# EAGLE board mainboard-gsm (EAGLE 6.2), part 1 of 2
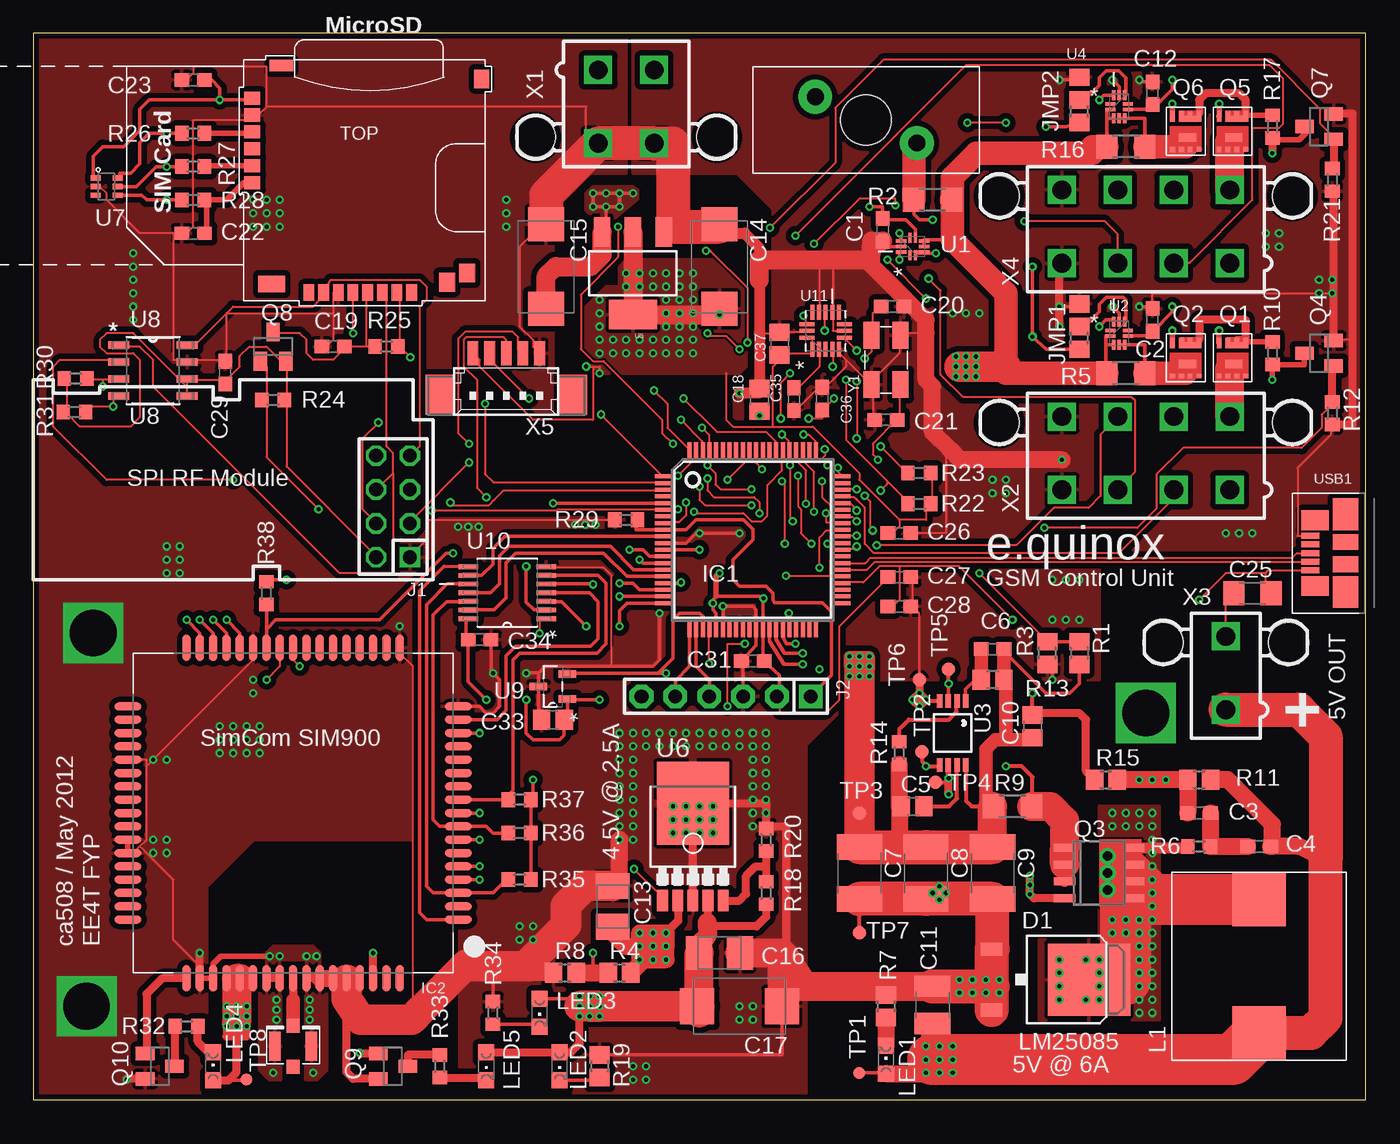
[diagram p0: board, top side]
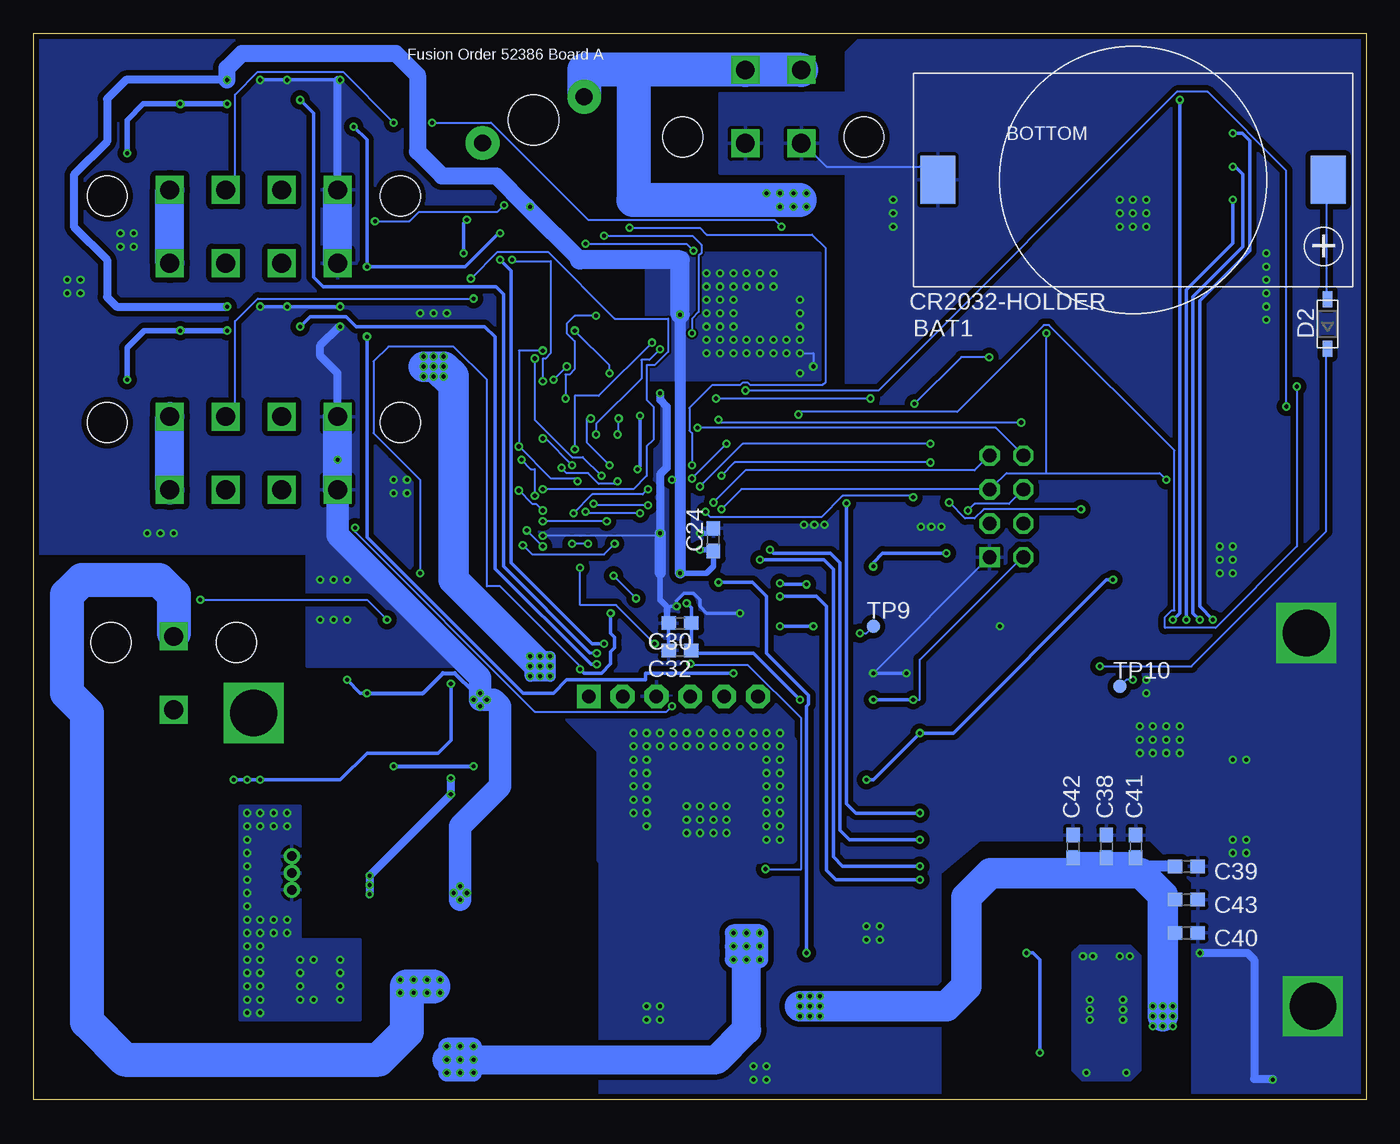
[diagram p1: board, bottom side, seen from below]

Size 100 x 80 mm. Coordinates in mm from the lower left corner, seen from the top.
Outline: 0,0 100,0 100,80 0,80 0,0
Copper layers (1*16): Top 0.035mm / dielectric 1.5mm / Bottom 0.035mm
Design rules: minimum track width 6mil, minimum drill 12mil, track to track 6mil, track to pad 6mil, pad to pad 6mil, via to via 6mil, smd to smd 0mil, copper to edge 10mil, drill to drill 10mil, minimum pad ring 10mil, minimum via ring 6mil, stop-mask expansion 2mil, vias tented up to drill 100mil, thermal gap 10mil
tRestrict: area 18.7,2 to 19,8; area 20,2 to 20.3,8

## Footprints (pad centres in the part's own frame; a part is rotated, then mirrored left to right if it is on the bottom)
U.FL = smd 2.2 x 0.85: P$1 0,1.375; P$2 0,-1.375 | smd 1.05 x 1: P$3 1.525,0; P$4 -1.525,0
CH28-2032L = smd 3.6 x 2.6: N 0,14.65; P 0,-14.65
C0603 = smd 1.1 x 1: 1 -0.85,0; 2 0.85,0
C0805 = smd 1.3 x 1.5: 1 -0.85,0; 2 0.85,0
C1812 = smd 1.9 x 3.4: 1 -1.95,0; 2 1.95,0
C1210 = smd 1.6 x 2.7: 1 -1.4,0; 2 1.4,0
B/3528-21R = smd 1.95 x 2.5: + 1.525,0; - -1.525,0
D/7343-31R = smd 2.55 x 2.7: + 3.175,0; - -3.175,0
C1206 = smd 1.6 x 1.8: 1 -1.4,0; 2 1.4,0
LTF153008 = drill 1.27 pad 2.54: 1 1.73,3.81; 2 -1.73,-3.81 | hole 3.78: 0,0
TO252-AA = smd 1 x 1.6: 1 -2.28,-6.07; 3 2.28,-6.07 | smd 5.4 x 6.2: 4 0,1.23
SOD-123 = smd 1.2 x 0.7: A 1.85,0; C -1.85,0
TQFP80-12X12 = smd 1.2 x 0.3: 1 -6.725,4.75; 2 -6.725,4.25; 3 -6.725,3.75; 4 -6.725,3.25; 5 -6.725,2.75; 6 -6.725,2.25; 7 -6.725,1.75; 8 -6.725,1.25; 9 -6.725,0.75; 10 -6.725,0.25; 11 -6.725,-0.25; 12 -6.725,-0.75; 13 -6.725,-1.25; 14 -6.725,-1.75; 15 -6.725,-2.25; 16 -6.725,-2.75; 17 -6.725,-3.25; 18 -6.725,-3.75; 19 -6.725,-4.25; 20 -6.725,-4.75; 41 6.725,-4.75; 42 6.725,-4.25; 43 6.725,-3.75; 44 6.725,-3.25; 45 6.725,-2.75; 46 6.725,-2.25; 47 6.725,-1.75; 48 6.725,-1.25; 49 6.725,-0.75; 50 6.725,-0.25; 51 6.725,0.25; 52 6.725,0.75; 53 6.725,1.25; 54 6.725,1.75; 55 6.725,2.25; 56 6.725,2.75; 57 6.725,3.25; 58 6.725,3.75; 59 6.725,4.25; 60 6.725,4.75 | smd 0.3 x 1.2: 21 -4.75,-6.725; 22 -4.25,-6.725; 23 -3.75,-6.725; 24 -3.25,-6.725; 25 -2.75,-6.725; 26 -2.25,-6.725; 27 -1.75,-6.725; 28 -1.25,-6.725; 29 -0.75,-6.725; 30 -0.25,-6.725; 31 0.25,-6.725; 32 0.75,-6.725; 33 1.25,-6.725; 34 1.75,-6.725; 35 2.25,-6.725; 36 2.75,-6.725; 37 3.25,-6.725; 38 3.75,-6.725; 39 4.25,-6.725; 40 4.75,-6.725; 61 4.75,6.725; 62 4.25,6.725; 63 3.75,6.725; 64 3.25,6.725; 65 2.75,6.725; 66 2.25,6.725; 67 1.75,6.725; 68 1.25,6.725; 69 0.75,6.725; 70 0.25,6.725; 71 -0.25,6.725; 72 -0.75,6.725; 73 -1.25,6.725; 74 -1.75,6.725; 75 -2.25,6.725; 76 -2.75,6.725; 77 -3.25,6.725; 78 -3.75,6.725; 79 -4.25,6.725; 80 -4.75,6.725
SIM900_SMT = smd 2 x 0.6: P$1 -12.4,8; P$2 -12.4,7; P$3 -12.4,6; P$4 -12.4,5; P$5 -12.4,4; P$6 -12.4,3; P$7 -12.4,2; P$8 -12.4,1; P$9 -12.4,0; P$10 -12.4,-1; P$11 -12.4,-2; P$12 -12.4,-3; P$13 -12.4,-4; P$14 -12.4,-5; P$15 -12.4,-6; P$16 -12.4,-7; P$17 -12.4,-8; P$35 12.4,-8; P$36 12.4,-7; P$37 12.4,-6; P$38 12.4,-5; P$39 12.4,-4; P$40 12.4,-3; P$41 12.4,-2; P$42 12.4,-1; P$43 12.4,0; P$44 12.4,1; P$45 12.4,2; P$46 12.4,3; P$47 12.4,4; P$48 12.4,5; P$49 12.4,6; P$50 12.4,7; P$51 12.4,8 | smd 0.6 x 2: P$18 -8,-12.4; P$19 -7,-12.4; P$20 -6,-12.4; P$21 -5,-12.4; P$22 -4,-12.4; P$23 -3,-12.4; P$24 -2,-12.4; P$25 -1,-12.4; P$26 0,-12.4; P$27 1,-12.4; P$28 2,-12.4; P$29 3,-12.4; P$30 4,-12.4; P$31 5,-12.4; P$32 6,-12.4; P$33 7,-12.4; P$34 8,-12.4; P$52 8,12.4; P$53 7,12.4; P$54 6,12.4; P$55 5,12.4; P$56 4,12.4; P$57 3,12.4; P$58 2,12.4; P$59 1,12.4; P$60 0,12.4; P$61 -1,12.4; P$62 -2,12.4; P$63 -3,12.4; P$64 -4,12.4; P$65 -5,12.4; P$66 -6,12.4; P$67 -7,12.4; P$68 -8,12.4
DIL-100-2X04 = drill 1.016 square: 1 -3.81,-1.27 | drill 1.016 octagon: 2 -3.81,1.27; 3 -1.27,-1.27; 4 -1.27,1.27; 5 1.27,-1.27; 6 1.27,1.27; 7 3.81,-1.27; 8 3.81,1.27
SIP-100-06-40 = drill 1.016 pad 1.778 square: 1 -6.35,0 | drill 1.016 pad 1.778 octagon: 2 -3.81,0; 3 -1.27,0; 4 1.27,0; 5 3.81,0; 6 6.35,0
A0R-JMP = smd 1.5 x 1.3: 1 0,1.7; 2 0,0; 3 0,-1.7
HC9-XXX-R = smd 4 x 4: 1 0,5; 2 0,-5
CHIPLED_0805 = smd 1.2 x 1.2: A 0,-1.05; C 0,1.05
IR_PQFN_FET = smd 0.35 x 0.35: 1 0,0; 2 0,-0.67; 3 0,-1.34; 5 2.7,-2.01; 6 2.7,-1.34; 7 2.7,-0.67; 8 2.7,0 | smd 0.45 x 1.69: 3B 0.4,-0.67 | smd 0.8 x 0.35: 4 0.225,-2.01 | smd 0.635 x 1.27: 9 1.8,-0.9
SO8-FET = smd 0.6 x 1.6: 1 -1.905,-2.6; 2 -0.635,-2.6; 3 0.635,-2.6; 4 1.905,-2.6; 5 1.905,2.6; 6 0.635,2.6; 7 -0.635,2.6; 8 -1.905,2.6 | drill 0.7: D1 -1.27,0.635; D2 0,0.635; D3 1.27,0.635
SOT23 = smd 1 x 1.4: 1 -0.95,-1.1; 2 0.95,-1.1; 3 0,1.1
R0805 = smd 1.3 x 1.5: 1 -0.85,0; 2 0.85,0
R1206 = smd 1.6 x 1.803: 1 -1.422,0; 2 1.422,0
R0603 = smd 1 x 1.1: 1 -0.85,0; 2 0.85,0
MOLEX_SDSIM_COMBO = smd 1.1 x 1.4: G1 0.25,1.435 | smd 1.75 x 0.85: G2 15.275,0.425 | smd 2 x 1.25: G3 16,16.825 | smd 1.2 x 0.98: S1 17.45,2.88; S2 17.45,5.42; S3 17.45,7.96; S4 17.45,4.15; S5 17.45,6.69; S6 17.45,9.23 | smd 1.2 x 1.4: ST1 2.84,16.7; ST2 1.34,16 | smd 0.8 x 1.25: T1 5.5,17.475; T2 6.6,17.475; T3 7.7,17.475; T4 8.8,17.475; T5 9.9,17.475; T6 11,17.475; T7 12.1,17.475; T8 13.2,17.475
TP09R = smd 0.9 x 0.9: TP 0,0
TP10R = smd 1 x 1: TP 0,0
QFN40P140X180X55-10N = smd 0.762 x 0.254: 1 -0.66,0.203; 2 -0.66,-0.203; 6 0.66,-0.203; 7 0.66,0.203 | smd 0.254 x 0.762: 3 -0.406,-0.864; 4 0,-0.864; 5 0.406,-0.864; 8 0.406,0.864; 9 0,0.864; 10 -0.406,0.864
MINI-SO8 = smd 0.41 x 1.02: 1 -0.975,-2.4; 2 -0.325,-2.4; 3 0.325,-2.4; 4 0.975,-2.4; 5 0.975,2.4; 6 0.325,2.4; 7 -0.325,2.4; 8 -0.975,2.4
SOT223 = smd 1.219 x 2.235: 1 -2.311,-3.099; 2 0,-3.099; 3 2.311,-3.099 | smd 3.6 x 2.2: 4 0,3.099
TO252-5 = smd 0.8 x 1.6: 1 -2.28,-6.07; 2 -1.14,-6.07; 3 0,-6.07; 4 1.14,-6.07; 5 2.28,-6.07 | smd 5.4 x 6.2: TAB 0,1.23
SC70-6L = smd 0.4 x 0.75: 1 -0.65,-0.825; 2 0,-0.825; 3 0.65,-0.825; 4 0.65,0.825; 5 -0.015,0.825; 6 -0.65,0.825
SOIC127P600X175-8N = smd 1.6 x 0.559: 1 -2.565,1.905; 2 -2.565,0.635; 3 -2.565,-0.635; 4 -2.565,-1.905; 5 2.565,-1.905; 6 2.565,-0.635; 7 2.565,0.635; 8 2.565,1.905
SOT95P237X112-3N = smd 1.321 x 0.559: 1 -1.092,0.94; 2 -1.092,-0.94; 3 1.092,0
SOP65P640X120-14N = smd 1.473 x 0.356: 1 -2.921,1.956; 2 -2.921,1.295; 3 -2.921,0.66; 4 -2.921,0; 5 -2.921,-0.66; 6 -2.921,-1.295; 7 -2.921,-1.956; 8 2.921,-1.956; 9 2.921,-1.295; 10 2.921,-0.66; 11 2.921,0; 12 2.921,0.66; 13 2.921,1.295; 14 2.921,1.956
QFN50P300X300X100-16N = smd 1.118 x 0.305: 1 -1.397,0.991; 2 -1.397,0.508; 3 -1.397,0; 4 -1.397,-0.508; 5 -1.397,-0.991; 9 1.397,-0.991; 10 1.397,-0.508; 11 1.397,0; 12 1.397,0.508; 13 1.397,0.991 | smd 0.305 x 1.118: 6 -0.508,-1.397; 7 0,-1.397; 8 0.508,-1.397; 14 0.508,1.397; 15 0,1.397; 16 -0.508,1.397
47346-0001 = smd 1.38 x 0.45: 1 2.66,1.3; 2 2.66,0.65; 3 2.66,0; 4 2.66,-0.65; 5 2.66,-1.3 | smd 1.9 x 2.375: SHIELD-1 0,2.913; SHIELD-4 0,-2.913 | smd 1.9 x 1.175: SHIELD-2 0,0.838; SHIELD-3 0,-0.838 | smd 2.1 x 1.475: SHIELD-6 2.3,2.462; SHIELD-7 2.3,-2.462
5566-4 = drill 1.4 square: 1 2.1,-2.75; 2 -2.1,-2.75; 3 2.1,2.75; 4 -2.1,2.75 | hole 3: 6.8,2.29; -6.8,2.29
5566-8 = drill 1.4 square: 1 6.3,-2.75; 2 2.1,-2.75; 3 -2.1,-2.75; 4 -6.3,-2.75; 5 6.3,2.75; 6 2.1,2.75; 7 -2.1,2.75; 8 -6.3,2.75 | hole 3: 11,2.29; -11,2.29
5566-2 = drill 1.4 square: 1 0,-2.75; 2 0,2.75 | hole 3: 4.7,2.29; -4.7,2.29
53398-05 = smd 0.8 x 1.8: 1 2.5,-2.5; 2 1.25,-2.5; 3 0,-2.5; 4 -1.25,-2.5; 5 -2.5,-2.5 | smd 2.1 x 3: S1 5,0.625; S2 -5,0.625
TXC-7B = smd 2 x 1.2: 1 -1.85,-1.1; 2 1.85,-1.1; 3 1.85,1.1; 4 -1.85,1.1

## Placement (x,y rotation side)
ANT1  U.FL  [U.FL]  19.5,4 90 top
BAT1  CR2032-HOLDER  [CH28-2032L]  17.5,69 90 bottom
C1  0.1u  [C0603]  63.75,65.25 270 top
C2  0.1u  [C0603]  84,58.5 90 top
C3  0.1u  [C0603]  87.5,21.5 180 top
C4  3300pF  [C0603]  92,19 180 top
C5  0.47uF  [C0805]  66,22 0 top
C6  1000pF  [C0603]  72,33.8 180 top
C7  22u  [C1812]  62,17 270 top
C8  22u  [C1812]  67,17 270 top
C9  22u  [C1812]  72,17 270 top
C10  1u  [C0805]  75,28 90 top
C11  100u  [C1210]  67.5,7.1 90 top
C12  0.1u  [C0603]  84,75.5 90 top
C13  100u  [B/3528-21R]  43.5,14.5 270 top
C14  10u  [D/7343-31R]  51.5,62.5 270 top
C15  10u  [D/7343-31R]  38.5,62.5 270 top
C16  100u  [B/3528-21R]  51.5,11 180 top
C17  10u  [D/7343-31R]  53,7 180 top
C18  10uF  [C0805]  54.5,52.5 270 top
C19  100nF  [C0603]  22.5,56.5 180 top
C20  100nF  [C0603]  64.5,59.5 180 top
C21  100nF  [C0603]  64,51 0 top
C22  22pF  [C0603]  12,65 180 top
C23  22pF  [C0603]  12,76.5 180 top
C24  100nF  [C0603]  49,42 90 bottom
C25  0.47uF  [C1206]  91.5,38 0 top
C26  100nF  [C0603]  65,42.5 180 top
C27  100nF  [C0603]  65,39.2 180 top
C28  100nF  [C0603]  65,37 180 top
C29  100nF  [C0603]  14.41,54.54 90 top
C30  100nF  [C0603]  51.5,35.75 180 bottom
C31  100nF  [C0603]  54,32.9 180 top
C32  100nF  [C0603]  51.5,33.7 180 bottom
C33  0.47u  [C0805]  39,28.5 180 top
C34  100nF  [C0603]  33.5,34.5 0 top
C35  100nF  [C0603]  57.09,52.56 270 top
C36  100nF  [C0603]  59.21,52.59 90 top
C37  4.7uF  [C0805]  56.01,56.72 90 top
C38  10nF  [C0603]  19.5,19 270 bottom
C39  10pF  [C0603]  13.5,17.5 180 bottom
C40  8.2pF  [C0603]  13.5,12.5 180 bottom
C41  39pF  [C0603]  17.3,19 270 bottom
C42  33pF  [C0603]  22,19 270 bottom
C43  100nF  [C0603]  13.5,15 180 bottom
CONN1  MINIBLADE_SOCKET  [LTF153008]  62.5,73.5 90 top
D1  6CWQ04FNPBF  [TO252-AA]  78,9 270 top
D2  [SOD-123]  2.9,58.2 90 bottom
IC1  PIC24FJ256GB108  [TQFP80-12X12]  54,42 0 top
IC2  [SIM900_SMT]  19.5,21.5 180 top
J1  F-2X04-DIL-100  [DIL-100-2X04]  27,44.5 90 top
J2  M-1X06-SIP-100-40  [SIP-100-06-40]  52,30.25 180 top
JMP1  0R-JUMPA  [A0R-JMP]  78.5,58 180 top
JMP2  0R-JUMPA  [A0R-JMP]  78.5,75 180 top
L1  22uH  [HC9-XXX-R]  92,10 0 top
LED1  [CHIPLED_0805]  64,3 0 top
LED2  [CHIPLED_0805]  39.5,2.5 180 top
LED3  [CHIPLED_0805]  38,6.5 180 top
LED4  [CHIPLED_0805]  13.5,2.5 0 top
LED5  [CHIPLED_0805]  34,2.5 180 top
Q1  IRFHM9331PBF  [IR_PQFN_FET]  91,57 270 top
Q2  IRFHM9331PBF  [IR_PQFN_FET]  87.5,57 270 top
Q3  SI4401BDY  [SO8-FET]  80,17 270 top
Q4  [SOT23]  96.5,56 90 top
Q5  IRFHM9331PBF  [IR_PQFN_FET]  91,74 270 top
Q6  IRFHM9331PBF  [IR_PQFN_FET]  87.5,74 270 top
Q7  [SOT23]  96.5,73 90 top
Q8  BSS84  [SOT23]  18,56.5 0 top
Q9  2N2007  [SOT23]  27,2.5 270 top
Q10  [SOT23]  9.5,2.5 270 top
R1  30k  [R0805]  78.5,33.5 270 top
R2  0.002  [R1206]  67.5,67.5 0 top
R3  10k  [R0805]  76.1,33.5 90 top
R4  2k  [R0805]  44,9.5 0 top
R5  0.002  [R1206]  82,54.5 0 top
R6  68k  [R0603]  87.5,19 0 top
R7  2.7k  [R0805]  64,7 270 top
R8  3k  [R0805]  39.9,9.5 0 top
R9  10m  [R1206]  73.5,22 0 top
R10  100k  [R0603]  93,56 90 top
R11  10k  [R0805]  87.5,24 0 top
R12  10k  [R0603]  97.5,51.5 90 top
R13  2.37k  [R0805]  72,31.5 180 top
R14  88.7k  [R0603]  65,26 90 top
R15  3.4k  [R0805]  80.5,24 0 top
R16  0.002  [R1206]  82,71.5 0 top
R17  100k  [R0603]  93,73 90 top
R18  57k  [R0603]  55,15.5 270 top
R19  2.7k  [R0805]  42.5,2.5 270 top
R20  22k  [R0603]  55,19.5 270 top
R21  10k  [R0603]  97.5,69 90 top
R22  2.7k  [R0603]  66.5,44.7 0 top
R23  2.7k  [R0603]  66.5,47 0 top
R24  10k  [R0603]  18,52.5 0 top
R25  10k  [R0603]  26.5,56.5 180 top
R26  22  [R0603]  12,72.5 180 top
R27  22  [R0603]  12,70 180 top
R28  22  [R0603]  12,67.5 180 top
R29  10k  [R0603]  44.5,43.5 0 top
R30  100k  [R0603]  3.17,54.09 0 top
R31  100k  [R0603]  3.09,51.59 0 top
R32  300  [R0603]  11.5,5.5 0 top
R33  300  [R0603]  30.5,2.5 270 top
R34  300  [R0603]  34.5,6.5 270 top
R35  2K7  [R0603]  36.5,16.5 0 top
R36  2K7  [R0603]  36.5,20 0 top
R37  2K7  [R0603]  36.5,22.5 0 top
R38  2K7  [R0603]  17.5,38 90 top
SLOT1  MOLEX_SD_SIM_CONN  [MOLEX_SDSIM_COMBO]  33.89,78.02 180 top
TP1  TPTP09R  [TP09R]  62,2 0 top
TP2  TPTP10R  [TP10R]  66.7,26.1 0 top
TP3  TPTP10R  [TP10R]  62,21.5 0 top
TP4  TPTP10R  [TP10R]  67.7,23.8 0 top
TP5  TPTP10R  [TP10R]  68.7,32.3 0 top
TP6  TPTP10R  [TP10R]  66.5,31.5 0 top
TP7  TPTP10R  [TP10R]  62,12.5 0 top
TP8  TPTP09R  [TP09R]  16,1.5 0 top
TP9  TPTP10R  [TP10R]  37,35.5 0 bottom
TP10  TPTP10R  [TP10R]  18.5,31 0 bottom
U1  INA199A2RSWT  [QFN40P140X180X55-10N]  66,64 90 top
U2  INA199A2RSWT  [QFN40P140X180X55-10N]  81.5,57.5 0 top
U3  LM25085MME  [MINI-SO8]  69,27.5 180 top
U4  INA199A2RSWT  [QFN40P140X180X55-10N]  81.5,74.5 0 top
U5  [SOT223]  45,62 180 top
U6  MIC35302  [TO252-5]  49.5,21 0 top
U7  [SC70-6L]  5.5,68.5 270 top
U8  AT45DB081D-SSU  [SOIC127P600X175-8N]  8.98,54.7 0 top
U9  REF3012AIDBZT  [SOT95P237X112-3N]  39,31 180 top
U10  SN74LVC07APW  [SOP65P640X120-14N]  35.57,38.03 180 top
U11  MMA8453Q  [QFN50P300X300X100-16N]  59.47,57.68 90 top
USB1  MOLEX47346-0001  [47346-0001]  98.5,41 180 top
X1  5566-4  [5566-4]  44.5,74.5 180 top
X2  5566-8  [5566-8]  83.5,48.5 0 top
X3  5566-2  [5566-2]  89.5,32 0 top
X4  5566-8  [5566-8]  83.5,65.5 0 top
X5  53398-05  [53398-05]  35.5,53.5 180 top
Y1  TXC-7B  [TXC-7B]  64,55.5 90 top

## Library data of the parts
ANT1 = SparkFun-Connectors
BAT1 Q1 Q2 Q5 Q6 = probox-parts
C1-C3 C6 C8-C10 C12 C18-C43 R1 R3 R4 R7 R8 R10 R12 R17-R38 = resistor
C4 = resistor; FARNELL: 1658867
C5 = resistor; FARNELL: 1907325
C7 = resistor; FARNELL: 1843167
C11 = resistor; FARNELL: 1907361
C13 C16 = resistor; FARNELL: 1658149
C14 C15 C17 = resistor; FARNELL: CA06884
CONN1 = eko-parts
D1 = probox-parts; FARNELL: 9101055
D2 Q4 Q7 Q9 Q10 = adafruit
IC1 = microchip; MPN: PIC24FJ256GB108-I/PT; OC_FARNELL: 1576869; OC_NEWARK: 54M5131
IC2 = microbuilder
J1 J2 = con-headers-jp
JMP1 JMP2 = jump-0r-smd
L1 = probox-parts; FARNELL: 2075650
LED1-LED5 = led
Q3 = probox-parts; FARNELL: 2101443
Q8 = transistor-small-signal; FARNELL: 1972673
R2 R5 R16 = resistor; FARNELL: 1621962
R6 = resistor; FARNELL: 1399961
R9 = resistor; FARNELL: 1099907
R11 = resistor; FARNELL: 1653284
R13 = resistor; FARNELL: 1652973
R14 = resistor; FARNELL: 1170981
R15 = resistor; FARNELL: 1160169
SLOT1 = farnellparts; FARNELL: 2064064; MOLEX: 49448-1411
TP1-TP10 = testpad
U1 U2 U4 = probox-parts; MPN: INA199A2RSWT; OC_FARNELL: 1815789; OC_NEWARK: 74R0562; PACKAGE: UQFN-10; SUPPLIER: Texas Instrument
U3 = probox-parts; FARNELL: 1689554
U5 = SparkFun-PowerIC; FARNELL: 2057285
U6 = probox-parts; FARNELL: 1822373
U7 = IC
U8 = farnellparts; DESCRIPTION: Data Flash; MPN: AT45DB081D-SSU; OC_FARNELL: 1455038; OC_NEWARK: 58M3836; PACKAGE: SOIC-8; SUPPLIER: Atmel
U9 = probox-parts; MPN: REF3120AIDBZT; OC_FARNELL: 1470321; OC_NEWARK: 90H3371; PACKAGE: SOT-23-3; SUPPLIER: Texas Instruments
U10 = farnellparts; DESCRIPTION: QUADRUPLE FET BUS SWITCH 2.5-V/3.3-V LOW-VOLTAGE BUS SWITCH WITH 5-V-TOLERANT LEVEL SHIFTER; MPN: SN74LVC07APW; OC_FARNELL: 1236302; OC_NEWARK: 13M5252; PACKAGE: TSSOP-14; SUPPLIER: Texas Instruments
U11 = farnellparts
USB1 = connectors-bbng
X1 X2 X4 = con-molex; OC_FARNELL: unknown; OC_NEWARK: unknown
X3 = con-molex; OC_FARNELL: 1822072; OC_NEWARK: unknown
X5 = con-molex; OC_FARNELL: 1125354; OC_NEWARK: unknown
Y1 = minibox-parts

## Nets
1.25VREF: IC1.23 JMP1.1 JMP2.1 U1.8 U9.2
2.8V: IC2.P$15 R35.2 R36.2 R37.2 R38.2
3.8V: C16.+ C17.+ C38.2 C39.2 C40.2 C41.2 C42.2 C43.2 IC2.P$55 IC2.P$56 IC2.P$57 LED2.A LED3.A LED4.A LED5.A R18.2 TP8.TP U6.4
!FLASH_CS!: IC1.80 R31.2 U8.4
!FLASH_RESET!: IC1.1 R30.2 U8.3
!MCLR!: IC1.9 J2.1 R29.2
!RF_CS!: IC1.78 J1.4
!SD_CS!: IC1.2 R25.1 SLOT1.T2
!SD_ON!: IC1.3 Q8.1 R24.1
+3V3: C1.1 C2.1 C12.1 C14.+ C24.1 C26.2 C27.2 C29.1 C30.1 C31.1 C32.1 C33.1 C34.1 C37.1 IC1.12 IC1.25 IC1.32 IC1.45 IC1.48 IC1.71 J1.2 J2.2 Q8.2 R22.2 R23.2 R24.2 R30.1 R31.1 U1.6 U2.6 U4.6 U5.2 U5.4 U8.5 U8.6 U9.1 U10.14 U11.1 X5.1
+5V: C4.1 C11.1 C13.+ L1.2 LED1.A R4.2 R11.2 TP1.TP U6.2 X3.1
+12V: C5.1 C6.1 C7.1 C8.1 C9.1 C10.1 R1.2 R2.2 R5.1 R9.1 R13.1 R14.1 R16.1 TP3.TP U1.4 U1.5 U2.2 U2.3 U3.8 U4.2 U4.3
AN12: IC1.33 U2.10
AN13: IC1.34 U4.10
AN14: IC1.35 U1.10
AN15: IC1.36 R1.1 R3.2
AXMTR_INT1: IC1.65 U11.11
AXMTR_INT2: U11.9
AXMTR_ON: C36.1 IC1.54 U11.14
DBG_RXD: IC2.P$28 R38.1 U10.2
DBG_RXD_H: TP9.TP U10.1
DBG_TXD: IC2.P$27 TP10.TP
EN_GSM_PSU: IC1.24 U6.1
GND: ANT1.P$1 ANT1.P$2 BAT1.N C1.2 C2.2 C7.2 C8.2 C9.2 C10.2 C11.2 C12.2 C13.- C14.- C15.- C16.- C17.- C18.1 C19.2 C20.1 C21.1 C22.2 C23.2 C24.2 C25.1 C26.1 C27.1 C28.1 C29.2 C30.2 C31.2 C32.2 C33.2 C34.2 C35.2 C36.2 C37.2 C38.1 C39.1 C40.1 C41.1 C42.1 C43.1 D1.1 D1.3 IC1.11 IC1.26 IC1.31 IC1.51 IC2.P$17 IC2.P$18 IC2.P$29 IC2.P$39 IC2.P$45 IC2.P$46 IC2.P$53 IC2.P$54 IC2.P$58 IC2.P$59 IC2.P$61 IC2.P$62 IC2.P$63 IC2.P$64 IC2.P$65 J1.1 J2.3 JMP1.3 JMP2.3 Q4.2 Q7.2 Q9.2 Q10.2 R3.1 R7.1 R8.1 R12.1 R15.1 R19.1 R20.1 R21.1 R29.1 R34.1 SLOT1.S4 SLOT1.T6 TP6.TP TP7.TP U1.9 U2.9 U3.4 U4.9 U5.1 U6.3 U6.TAB U7.2 U8.7 U9.3 U10.7 U11.5 U11.7 U11.10 U11.12 U11.15 USB1.5 X1.3 X1.4 X2.4 X2.8 X3.2 X4.4 X4.8 X5.5 Y1.2 Y1.4
GPIO11: IC2.P$67
GPIO12: IC2.P$68
GSM_CTS: IC1.13 IC2.P$7
GSM_DCD: IC1.14 IC2.P$5
GSM_DTR: IC2.P$3 R35.1 U10.10
GSM_DTR_H: IC1.15 U10.11
GSM_RESET: IC2.P$16 U10.4
GSM_RESET_H: IC1.20 U10.3
GSM_RI: IC1.19 IC2.P$4
GSM_RTS: IC2.P$8 R36.1 U10.12
GSM_RTS_H: IC1.16 U10.13
GSM_RXD: IC2.P$10 R37.1 U10.6
GSM_RXD_H: IC1.18 U10.5
GSM_STATUS: IC2.P$66 Q9.1
GSM_STATUS_H: Q9.3 R33.1
GSM_TXD: IC1.5 IC2.P$9
MISO: IC1.8 J1.7 SLOT1.T7 U8.8
MOSI: IC1.6 J1.6 SLOT1.T3 U8.1
N$1: C35.1 U11.2
N$2: R26.1 SLOT1.S2
N$3: R27.1 SLOT1.S3
N$4: C22.1 R28.1 SLOT1.S6
N$5: ANT1.P$3 IC2.P$60
N$6: Q10.3 R32.1
N$7: LED5.C R33.2
N$8: LED4.C R32.2
N$9: BAT1.P D2.A
N$10: Q3.4 TP4.TP U3.6
N$11: D1.4 L1.1 Q3.5 Q3.6 Q3.7 Q3.8 Q3.D1 Q3.D2 Q3.D3 R6.1
N$12: Q5.1 Q5.2 Q5.3 Q5.3B Q6.1 Q6.2 Q6.3 Q6.3B R17.2
N$13: C5.2 U3.7
N$14: Q3.1 Q3.2 Q3.3 R9.2 TP2.TP U3.5
N$15: Q5.4 Q6.4 Q7.3 R17.1
N$16: C6.2 R13.2 U3.1
N$17: JMP1.2 U2.8
N$18: Q5.5 Q5.6 Q5.7 Q5.8 Q5.9 X4.1 X4.5
N$19: Q1.1 Q1.2 Q1.3 Q1.3B Q2.1 Q2.2 Q2.3 Q2.3B R10.2
N$20: Q1.4 Q2.4 Q4.3 R10.1
N$21: C3.1 C4.2 R6.2
N$22: C3.2 R11.1 R15.2 TP5.TP U3.3
N$23: LED3.C R34.2
N$24: Q1.5 Q1.6 Q1.7 Q1.8 Q1.9 X2.1 X2.5
N$25: R18.1 R20.2 U6.5
N$26: CONN1.2 R2.1 U1.2 U1.3
N$27: JMP2.2 U4.8
N$29: U7.3
N$31: LED1.C R7.2
N$32: LED2.C R19.2
N$38: C18.2 IC1.70
NETLIGHT: IC2.P$52 Q10.1
OSCI: C21.2 IC1.49 Y1.1
OSCO: C20.2 IC1.50 Y1.3
PGEC2: IC1.21 J2.5
PGED2: IC1.22 J2.4
PORT1_IO0: IC1.57 X2.2
PORT1_IO1: IC1.58 X2.3
PORT1_IO2: IC1.59 X2.6
PORT1_IO3: IC1.60 X2.7
PORT1_IOUT: Q2.5 Q2.6 Q2.7 Q2.8 Q2.9 R5.2 U2.4 U2.5
PORT1_ON: IC1.52 Q4.1 R12.2
PORT2_IO0: IC1.61 X4.2
PORT2_IO1: IC1.62 X4.3
PORT2_IO2: IC1.63 X4.6
PORT2_IO3: X4.7
PORT2_IOUT: Q6.5 Q6.6 Q6.7 Q6.8 Q6.9 R16.2 U4.4 U4.5
PORT2_ON: IC1.53 Q7.1 R21.2
PWRKEY: IC2.P$1 U10.8
PWRKEY_H: IC1.10 U10.9
RF_CE: IC1.79 J1.3
RF_IRQ: IC1.77 J1.8
RPI38: IC1.4
RT: R14.2 U3.2
SCL1: IC1.56 R22.1 U11.4
SCLK: IC1.7 J1.5 SLOT1.T5 U8.2
SD_VDD: C19.1 Q8.3 R25.2 SLOT1.T4
SDA1: IC1.55 R23.1 U11.6
SENSE_5V: IC1.17 R4.1 R8.2
SIM_CLK: IC2.P$32 R27.2 U7.5
SIM_DATA: IC2.P$31 R28.2 U7.4
SIM_RST: IC2.P$33 R26.2 U7.6
SIM_VDD: C23.1 IC2.P$30 SLOT1.S1 U7.1
U2_RTS: IC1.64 X5.4
U2_RXD: IC1.67 X5.2
U2_TXD: IC1.66 X5.3
UD_N: IC1.46 USB1.2
UD_P: IC1.47 USB1.3
USB_VBUS: C25.2 C28.2 IC1.44 USB1.1
V+: C15.+ CONN1.1 U5.3 X1.1 X1.2
VRTC: D2.C IC2.P$26